# EAGLE board Circuito Original (EAGLE 7.6.0)

Size 56.82 x 53.33 mm. Coordinates in mm from the lower left corner, seen from the top.
Outline: 0,0 56.82,0 56.82,53.33 0,53.33 0,0
Copper layers (1*16): Top 0.035mm / dielectric 1.5mm / Bottom 0.035mm
Design rules "default": minimum track width 10mil, minimum drill 24mil, track to track 8mil, track to pad 8mil, pad to pad 8mil, via to via 8mil, smd to smd 8mil, copper to edge 40mil, drill to drill 8mil, minimum pad ring 10mil, minimum via ring 8mil, stop-mask expansion 4mil, vias tented up to drill 0mil, thermal gap 10mil

## Footprints (pad centres in the part's own frame; a part is rotated, then mirrored left to right if it is on the bottom)
2P-2.54-65/35MIL = drill 0.889 pad 1.651 square: 1 0,1.27 | drill 0.889 pad 1.651: 2 0,-1.27
0207/10 = drill 0.813 octagon: 1 -5.08,0; 2 5.08,0

## Placement (x,y rotation side)
P1  5V  [2P-2.54-65/35MIL]  5,10.08 0 top
R1  1.2k‎Ω  [0207/10]  5,22.78 0 top
R2  1.2k‎Ω  [0207/10]  5,35.48 0 top
RRL_3  220‎Ω  [0207/10]  5,48.18 0 top
RRL_4  470‎Ω  [0207/10]  5,60.88 0 top  (outside the outline)
RRL_5  680‎Ω  [0207/10]  5,73.58 0 top  (outside the outline)
RRL_6  820‎Ω  [0207/10]  5,86.28 0 top  (outside the outline)
RRL_7  1000‎Ω  [0207/10]  5,98.98 0 top  (outside the outline)
RRL_8  1500‎Ω  [0207/10]  5,111.68 0 top  (outside the outline)
RRL_9  1800‎Ω  [0207/10]  5,124.38 0 top  (outside the outline)
RRL_10  2200‎Ω  [0207/10]  5,137.08 0 top  (outside the outline)
RRL_11  3900‎Ω  [0207/10]  5,149.78 0 top  (outside the outline)
RRL_12  4700‎Ω  [0207/10]  5,162.48 0 top  (outside the outline)

## Library data of the parts
P1 R1 R2 RRL_3-RRL_12 = AUTODESK_CIRCUITS_BREADBOARD

## Nets
N$1: R1.2 R2.2
N$2: P1.2 R1.1
N$3: P1.1 R2.1

## Tracks (layer width: path | path; a pad name or v marks a point on that pad's centre or on a via)
N$1  (1 unrouted)
N$2  (1 unrouted)
N$3  (1 unrouted)